# Altium PCB isg_cena_host_board_rev1.PcbDoc
Units mil, origin at the board's own origin, x right, y up, seen from the top; angles counter-clockwise.
Board outline 3600 x 3600 mil, 2 copper layers (Top Layer, Bottom Layer); 44 components, 52 nets, 265 pads, 4 vias.
Unrouted connection lines stored in the file: 183.
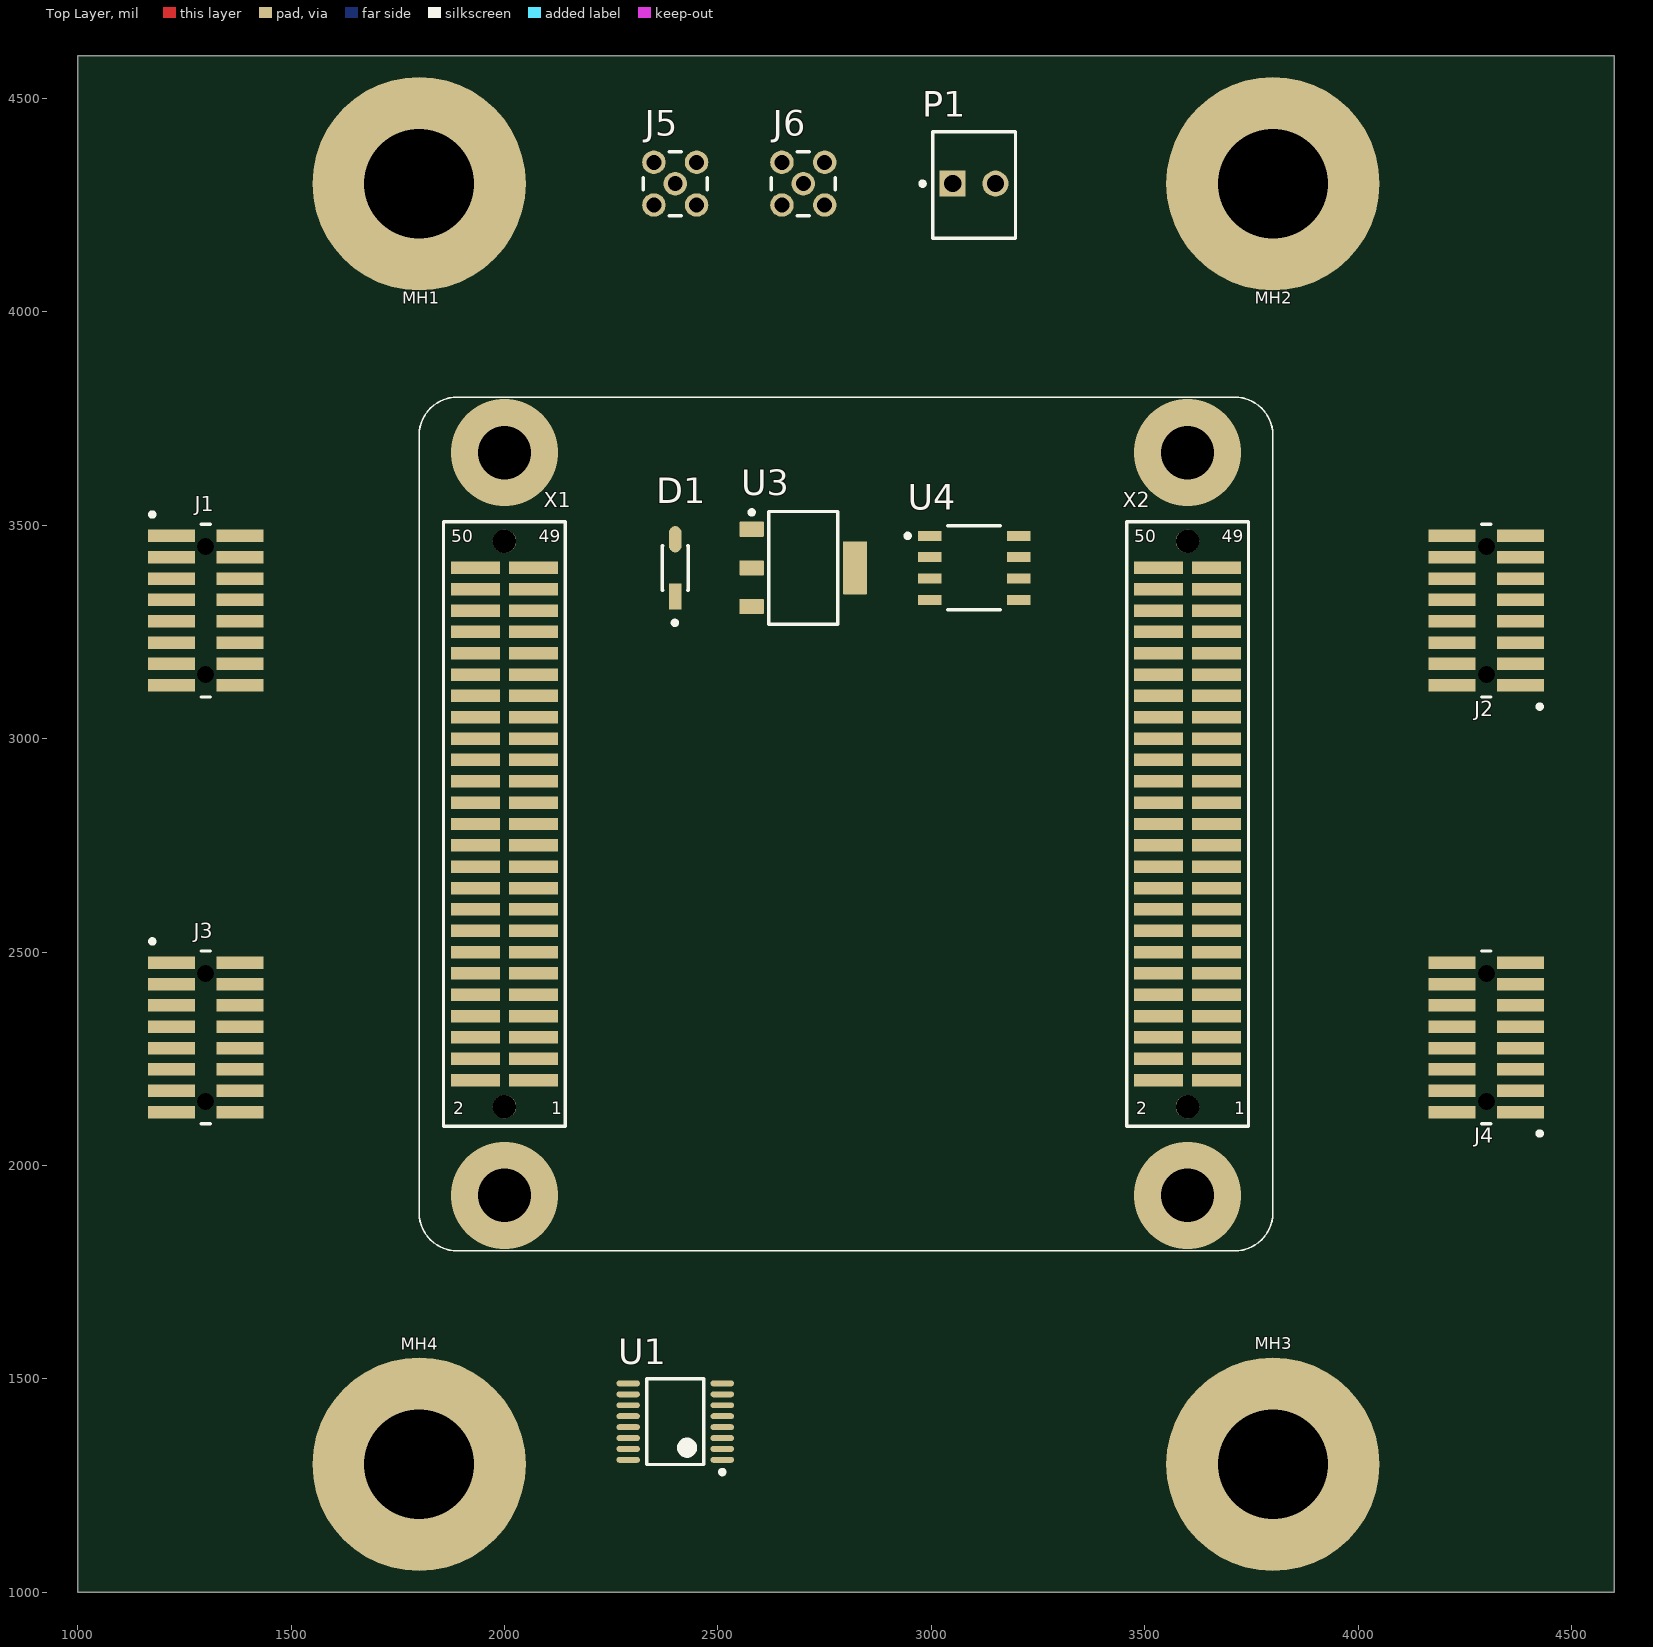
[diagram p0: Top Layer view]
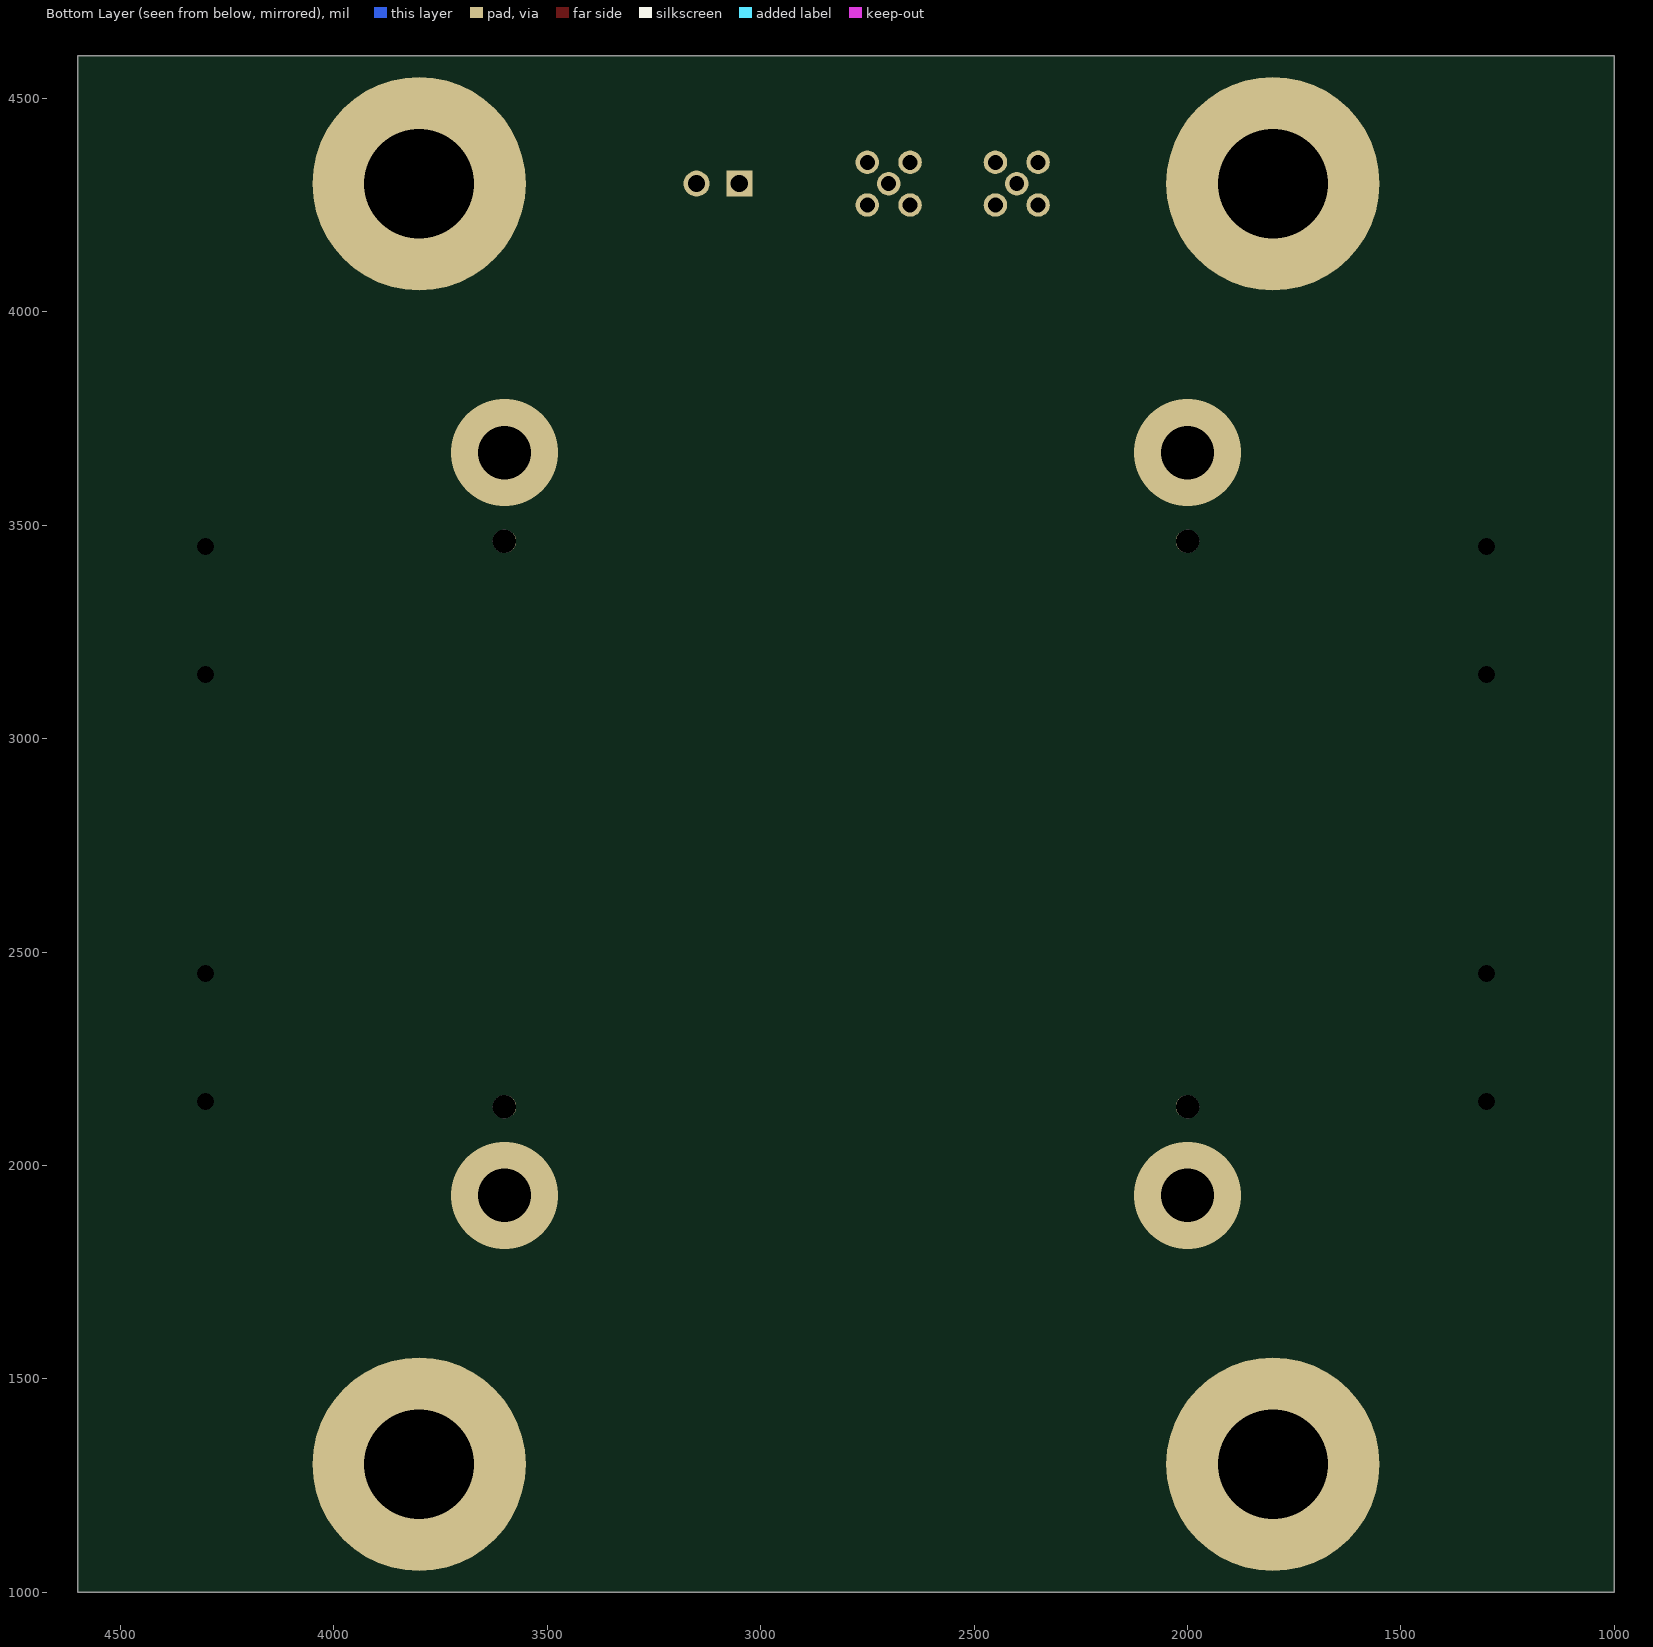
[diagram p1: Bottom Layer view, seen from below]

## Layer stack, top to bottom
Top Solder: solder mask 0.4, Solder Resist, Dk 3.5
Top Layer: signal copper 1.4
Dielectric 1: dielectric 12.6, FR-4, Dk 4.8
Bottom Layer: signal copper 1.4
Bottom Solder: solder mask 0.4, Solder Resist, Dk 3.5

## Board outline
1000,1000 4600,1000 4600,4600 1000,4600

## Design rules (kind name [scope] priority, off if disabled: settings)
Clearance [All] p1: gap=10 ignorepadtopadclearanceinfootprint=FALSE except(0: Arc-Hole Track-Hole SMDPad-Hole THPad-Hole Via-Hole Fill-Hole Poly-Hole Region-Hole Text-Hole)
PolygonConnect [All] p1: connectstyle=Relief reliefconductorwidth=10 reliefentries=4 polygonreliefangle="90 Angle" airgapwidth=10
RoutingVias [All] p1: holewidth=28 width=50 viastyle="Through Hole" minholewidth=28 minwidth=50 maxholewidth=28 maxwidth=50
SolderMaskExpansion [All] p1: expansion=4 istentingtop=FALSE
Width [All] p1: maxlimit=10 minlimit=10 preferedwidth=10
30 further rules are at their usual default settings.

## Components (designator, comment, footprint, x,y, rotation, side; value= is the part's Value field where it differs from the comment)
C1 "CAP CER 0.1uF 50V X7R 0603" FP-CC0603-DA-MFG 7600,2900 r0 top value="100 nF"
C2 "CAP CER 1uF 0805 16V X7R" CAPC2013X140X50NL20T25 7800,2900 r0 top
C3 "CAP CER 10uF 0805 10V X7R" CAPC2013X140X50NL20T25 8000,2900 r0 top
C4 "CAP CER 0.1uF 50V X7R 0603" FP-CC0603-DA-MFG 6600,2900 r0 top value="100 nF"
C5 "CAP CER 0.1uF 50V X7R 0603" FP-CC0603-DA-MFG 6800,2900 r0 top value="100 nF"
C6 "CAP CER 1uF 0805 16V X7R" CAPC2013X140X50NL20T25 11600,2700 r0 top
C7 "CAP CER 10uF 0805 10V X7R" CAPC2013X140X50NL20T25 11800,2900 r0 top
C8 "CAP CER 0.1uF 50V X7R 0603" FP-CC0603-DA-MFG 11100,2900 r0 top value="100 nF"
C9 "CAP CER 0.1uF 50V X7R 0603" FP-CC0603-DA-MFG 5500,2900 r0 top value="100 nF"
D1 "1N5819HW-7-F" FP-SOD123-IPC_A 2400,3400 r90 top
J1 "" FP-FTSH-108-02-F-DV 1300,3300 r270 top
J2 "" FP-FTSH-108-02-F-DV 4300,3300 r90 top
J3 "" FP-FTSH-108-02-F-DV 1300,2300 r270 top
J4 "" FP-FTSH-108-02-F-DV 4300,2300 r90 top
J5 "CONMMCX002" CON-MMCX-RA 2400,4300 r0 top
J6 "CONMMCX002" CON-MMCX-RA 2700,4300 r0 top
MH1 "OPTICAL-MOUNT-HOLE-1/4-20" MH-1/4-20 1800,4300 r0 top
MH2 "OPTICAL-MOUNT-HOLE-1/4-20" MH-1/4-20 3800,4300 r0 top
MH3 "OPTICAL-MOUNT-HOLE-1/4-20" MH-1/4-20 3800,1300 r0 top
MH4 "OPTICAL-MOUNT-HOLE-1/4-20" MH-1/4-20 1800,1300 r0 top
P1 "22-23-2021" MOLX-22-23-2021_V 3100,4300 r0 top
R1 "RES SMD 0 OHM 0603" RESC1609X50X30LL10T20 7500,2900 r0 top
R2 "DNP" RESC1609X50X30LL10T20 6200,2900 r0 top
R3 "RES SMD 0 OHM 0603" RESC1609X50X30LL10T20 11500,2900 r0 top
R4 "RES SMD 240 OHM 0603" RESC1609X50X30LL10T20 11300,2900 r0 top
R5 "RES SMD 100 OHM 0603" RESC1609X50X30LL10T20 10700,2900 r0 top
TP1 "5001" KSTN-5001 7000,1600 r0 top
TP2 "5001" KSTN-5001 7200,1600 r0 top
TP3 "5001" KSTN-5001 9900,2800 r0 top
TP4 "5001" KSTN-5001 10100,2800 r0 top
TP5 "5002" KSTN-5002 5200,1000 r0 top
TP6 "5002" KSTN-5002 5200,1300 r0 top
TP7 "5002" KSTN-5002 5200,1600 r0 top
TP8 "5002" KSTN-5002 5200,1900 r0 top
TP9 "5002" KSTN-5002 5300,2800 r0 top
TP10 "5002" KSTN-5002 12400,2800 r90 top
TP11 "5002" KSTN-5002 12600,2800 r90 top
TP12 "5001" KSTN-5001 10800,2800 r90 top
U1 "DAC8555IPWG4" TI-PW16_L 2400,1400 r180 top
U2 "MCP1541T-I/TT" SOT-23-TT3_L 6400,2800 r0 top
U3 "LM317EMP/NOPB" DCY0004A_L 2700,3400 r0 top
U4 "LM317LD13TR" FP-SO-8-0016023-MFG 3100,3400 r0 top
X1 "TFM-125-02-X-D-A" SAMTEC-TFM-125-02-X-D-A 2000,2800 r90 top
X2 "TFM-125-02-X-D-A" SAMTEC-TFM-125-02-X-D-A 3600,2800 r90 top

## Footprints (in the part's own frame and the unit in brackets; to place one, negate y for a bottom-side part, rotate by r counter-clockwise, add the part's x,y. Pads: shape width x height; smd on the part's side, far side on the other; paste and mask are expansions set on the pad)
CAPC2013X140X50NL20T25 [mm] "Chip Capacitor, 2-Leads, Body 2.00x1.25mm, IPC Medium Density"
  rect 1.3x1.45 smd: 1(-0.8,0) 2(0.8,0)
  body extent -1.1,-0.72 1.1,0.72, height 1.4
CON-MMCX-RA [mil] "Connector, MMCX Female, 5-Lead, Thru-Hole, Right-Angle, Body 3.45x3.45mm"
  round 55 hole 35: 1(0,0) 2(-50,50) 3(50,50) 4(50,-50) 5(-50,-50)
  silkscreen extent -75,-75 75,75
DCY0004A_L [mm] "SOT223, 4-Leads, Body 6.7x3.7mm, Pitch 2.3mm, IPC High Density"
  rrect11% 1.45x0.9 smd: 1(-3.075,2.3) 2(-3.075,0) 3(-3.075,-2.3)
  rrect7% 1.45x3.15 smd: 4(3.075,0)
  silkscreen extent -3.2,-3.35 2.05,3.42, body extent -3.5,-3.25 3.5,3.25, height 1.62
FP-CC0603-DA-MFG [mm]
  rect 0.8x0.9 smd paste+0 mask+0: 1(-0.75,0) 2(0.75,0)
  silkscreen extent -0.85,-0.85 0.85,0.85, body extent -1.35,-0.75 1.35,0.75, height 0.25
FP-FTSH-108-02-F-DV [mm]
  rect 0.74x2.79 smd paste+0 mask+0: 1(-4.445,-2.035) 2(-4.445,2.035) 3(-3.175,-2.035) 4(-3.175,2.035) 5(-1.905,-2.035) 6(-1.905,2.035) 7(-0.635,-2.035) 8(-0.635,2.035) 9(0.635,-2.035) 10(0.635,2.035) 11(1.905,-2.035) 12(1.905,2.035) 13(3.175,-2.035) 14(3.175,2.035) 15(4.445,-2.035) 16(4.445,2.035)
  round 0.1 hole 1.02 unplated: H1(-3.81,0) H2(3.81,0)
  silkscreen extent -5.84,-3.3 5.15,0.27, body extent -5.25,-3.53 5.25,3.53, height 0.25
FP-SO-8-0016023-MFG [mm]
  rect 1.4x0.6 smd paste+0 mask+0: 1(-2.65,1.905) 2(-2.65,0.635) 3(-2.65,-0.635) 4(-2.65,-1.905) 5(2.65,-1.905) 6(2.65,-0.635) 7(2.65,0.635) 8(2.65,1.905)
  silkscreen extent -4.08,-2.5 1.58,2.5, body extent -3.45,-2.6 3.45,2.6, height 0.25
FP-SOD123-IPC_A [mil]
  rect 61.32x29.23 smd paste+0 mask+0: 1(-66.94,0)
  rrect100% 61.32x29.23 smd paste+0 mask+0: 2(66.94,0)
  silkscreen extent -134,-31 52,31, body extent -117,-50 117,50, height 10
KSTN-5001 [mm] "Test Point, Through Hole, Dia 2.54mm"
  round 1.55 hole 1.016: 1(0,0)
  silkscreen extent -1.27,-1.27 1.27,1.27, body extent -1.25,-1.25 1.25,1.25, height 4.62
KSTN-5002 [mm] "Test Point, Through Hole, Dia 2.54mm"
  round 1.55 hole 1.016: 1(0,0)
  silkscreen extent -1.27,-1.27 1.27,1.27, body extent -1.25,-1.25 1.25,1.25, height 4.62
MH-1/4-20 [mil]
  round 500 hole 257: PAD(0,0)
MOLX-22-23-2021_V [mm] "THD, 2-Leads, Body 6.35x4.93mm, Pitch 2.54mm"
  rect 1.55x1.55 hole 1.02: 1(-1.27,0)
  round 1.55 hole 1.02: 2(1.27,0)
  silkscreen extent -3.19,-3.25 2.46,3.1, body extent -2.46,-3.25 2.46,3.1, height 10.66
RESC1609X50X30LL10T20 [mm] "Chip Resistor, 2-Leads, Body 1.55x0.85mm, IPC High Density"
  rect 0.7x0.85 smd: 1(-0.575,0) 2(0.575,0)
  body extent -0.82,-0.48 0.82,0.48, height 0.5
SAMTEC-TFM-125-02-X-D-A [mm]
  rect 0.74x2.92 smd: 1(-15.24,-1.714) 2(-15.24,1.714) 3(-13.97,-1.714) 4(-13.97,1.714) 5(-12.7,-1.714) 6(-12.7,1.714) 7(-11.43,-1.714) 8(-11.43,1.714) 9(-10.16,-1.714) 10(-10.16,1.714) 11(-8.89,-1.714) 12(-8.89,1.714) 13(-7.62,-1.714) 14(-7.62,1.714) 15(-6.35,-1.714) 16(-6.35,1.714) 17(-5.08,-1.714) 18(-5.08,1.714) 19(-3.81,-1.714) 20(-3.81,1.714) 21(-2.54,-1.714) 22(-2.54,1.714) 23(-1.27,-1.714) 24(-1.27,1.714) 25(0,-1.714) 26(0,1.714) 27(1.27,-1.714) 28(1.27,1.714) 29(2.54,-1.714) 30(2.54,1.714) 31(3.81,-1.714) 32(3.81,1.714) 33(5.08,-1.714) 34(5.08,1.714) 35(6.35,-1.714) 36(6.35,1.714) 37(7.62,-1.714) 38(7.62,1.714) 39(8.89,-1.714) 40(8.89,1.714) 41(10.16,-1.714) 42(10.16,1.714) 43(11.43,-1.714) 44(11.43,1.714) 45(12.7,-1.714) 46(12.7,1.714) 47(13.97,-1.714) 48(13.97,1.714) 49(15.24,-1.714) 50(15.24,1.714)
  round 1.4 hole 1.4: MH1(-16.828,0) MH2(16.828,0)
  silkscreen extent -17.98,-3.63 17.98,3.63
SOT-23-TT3_L [mm] "SOT23, 3-Leads, Body 2.9x1.3mm, Pitch 0.95mm, Lead Span 2.4mm, IPC High Density"
  rect 1.2x0.6 smd: 1(-0.9,0.95) 2(-0.9,-0.95) 3(0.9,0)
  silkscreen extent -1.02,-1.55 0.7,1.92, body extent -0.7,-1.52 0.7,1.53, height 1.12
TI-PW16_L [mm] "SOP, 16-Leads, Body 5x4.4mm, Pitch 0.65mm, IPC High Density"
  oval 1.4x0.35 smd: 1(-2.8,2.275) 2(-2.8,1.625) 3(-2.8,0.975) 4(-2.8,0.325) 5(-2.8,-0.325) 6(-2.8,-0.975) 7(-2.8,-1.625) 8(-2.8,-2.275) 9(2.8,-2.275) 10(2.8,-1.625) 11(2.8,-0.975) 12(2.8,-0.325) 13(2.8,0.325) 14(2.8,0.975) 15(2.8,1.625) 16(2.8,2.275)
  silkscreen extent -2.93,-2.55 1.7,3.12, body extent -2.25,-2.55 2.25,2.55, height 1.2

## Part data
C1 C4 C5 C8 C9: library part CMP-03422-000030-1, Capacitance="100 nF", Manufacturer=YAGEO, Manufacturer Part Number=CC0603KRX7R7BB104, Package=CC0603-DA, Temperature="-55°C to +125°C", Temperature Characteristic=X7R, Temperature Coefficient=15%, Temperature Range High=+125°C, Temperature Range Low=-55°C, Tolerance=0.1, Voltage="16 V", Automotive=No, Category=Cap, ComponentLink2Description=Datasheet, ComponentLink2URL=http://www.yageo.com/documents/recent/UPY-GPHC_X7R_6.3V-to-50V_18.pdf, Device Class L1="Passive Components", Device Class L2=Capacitors, Device Class L3="Ceramic Capacitors", Digikey Description="CAP CER 0.1UF 16V X7R 0603", Footprint Url=http://www.yageo.com/exep/pages/download/literatures/UPY-C_GEN_24.pdf, Height=0.9mm, Lead Free=Yes, Material=Ceramic, Mouser Description="Multilayer Ceramic Capacitor, CC Series, 0.1 - F, - 10%, X7R, 16 V, 0603 [1608 Metric]", Octopart=https://octopart.com/cc0603krx7r7bb104-yageo-192941, RoHS=TRUE, Voltage Rating="16 V"
C2 C3 C6 C7: library part CMP-2007-04677-1, Manufacturer="AVX Interconnect / Elco", Part Number=0805ZC475KAT2A
D1: library part CMP-0303-00003-3, "DIODE SCHOTTKY 40V 1A SOD123", Average Rectified Current=1A, Capacitance=110pF, Case/Package=SOD-123-2, Forward Voltage=450mV, Max Forward Surge Current (Ifsm)=25A, Max Operating Temperature=125°C, Max Power Dissipation=450mW, Max Repetitive Reverse Voltage (Vrrm)=40V, Min Operating Temperature=-65°C, Package Quantity=3000, Peak Reverse Current=50uA, Contact Plating=Tin, Current Rating=1A, Element Configuration=Single, Forward Current=1A, Height=1.25mm, Lead Free="Lead Free", Length=2.85mm, Max Reverse Voltage (DC)=40V, Number of Pins=2, Output Current=1A, Packaging="Tape and Reel", Peak Non-Repetitive Surge Current=25A, Polarity=Standard, Radiation Hardening=No, REACH SVHC="No SVHC", Termination=SMD/SMT, Voltage Rating (DC)=40V, Weight=0.000353oz, Width=1.7mm
J1 J2 J3 J4: library part FP-FTSH-108-02-F-DV, "CONN HEADER SMD 16POS 1.27MM", Current Rating=3.4A, Manufacturer=Samtec, Manufacturer Part Number=FTSH-108-02-F-DV, Temperature="-55°C to +125°C", Temperature Range High=+125°C, Temperature Range Low=-55°C, Automotive=No, Category=Conn, ComponentLink2Description=Datasheet, ComponentLink2URL=http://suddendocs.samtec.com/prints/ftsh-1xx-xx-xxx-dv-xxx-xxx-mkt.pdf, Conn Gender=Male, Conn Orientation=Vertical, Contact Material=Gold,Nickel, Device Class L1=Connectors, Device Class L2="Headers and Wire Housings", Device Class L3=unset, Digikey Description="CONN HEADER SMD 16POS 1.27MM", Footprint Url=http://suddendocs.samtec.com/prints/ftsh-1xx-xx-xxx-dv-xxx-footprint.pdf, Height=5.09mm, Lead Free=Yes, Mouser Description="Conn Unshrouded Header HDR 16 POS 1.27mm Solder ST SMD Tube", Number Of Contacts=16, Number Of Rows=2, Octopart=https://octopart.com/ftsh-108-02-f-dv-samtec-10605893, Package=FTSH-108-02-F-DV, Pitch=1.27mm, RoHS=TRUE, Standoff Height=0.46mm
J5 J6: library part CMP-0168-00017-1, "MMCX Female Right Angle PCB Mount Connector, Thru-Hole", DatasheetVersion="rev1.0, Jun-2007", PackageDescription="MMCX Female Right Angle PCB Mount Connector, Thru-Hole, 3.45 x 3.45 mm Body", PackageReference=CON-MMCX-RA, PackageVersion="rev1.0, Jun-2007", PCB_Layout="Pads complies with manufacturer's recommendation."
P1: library part CMP-1704-00001-3, "Male Header, Pitch 2.54 mm, 1 x 2 Position, Height 10.67 mm, Tail Length 3.56 mm, 0 to 75 degC, RoHS, Bulk", Max Operating Temperature="75 degC", Min Operating Temperature="0 degC", Package Quantity=3000, ComponentLink1Description="Manufacturer URL", ComponentLink1URL=http://www.molex.com/, ComponentLink2Description=Datasheet, ComponentLink2URL=https://datasheet.ciiva.com/19454/232266-19454304.pdf, Height="10.67 mm", Length="5.08 mm", Mount="Through Hole", Mounting Technology="Through Hole", PackageDescription="Male Header, Pitch 2.54 mm, 1 x 2 Position, Height 10.67 mm, Tail Length 3.56 mm", Packaging=Bulk, PartNumber=22-23-2021, Pins=2, Radiation Hardening=No, REACH SVHC=Unknown, RoHSCompliant=True, Width="6.35 mm"
R1 R2 R3 R4 R5: library part CMP-2000-03820-1, Manufacturer="Vishay Dale", Part Number=CRCW0603100KFKEA
TP1 TP2 TP3 TP4 TP12: library part CMP-2000-05181-1, "Test Point, Black, 1-Pin THD, RoHS, Bulk", Alternate Color="5004K-ND / -TESTPOINTPCMINI.040\"DYELLOW / 5003K-ND / -TESTPOINTPCMINI.040\"DORANGE / 5002K-ND / -TESTPOINTPCMINI.040\"DWHITE / 5000K-ND / -TESTPOINTPCMINI.040\"DRED", Color=Black, Manufacturer=Keystone, Standard Package=100, Catalog Drawings=5000Series, Category=TestandMeasurement, Datasheet URL=https://ciiva.com/datasheet-click-2917627?src=ciiva&sig=bd195616, Datasheet Version="Rev. G, 12/2008", Family=TestPoints, Kits="DKTGRS232C-KIT-ND / -TTLCONVERTER", Manufacturer URL=http://www.keyelco.com/, Material=Base,Nylon46,UL94V-0, Mounting Type="0.040\"(1.02mm)HoleDiameter", Online Catalog=ColorCodedTestPoints, Other Names=5001K, Packaging=Bulk, RoHS Information=RoHSComplianceStatement, Series=THM, Terminal="0.010\"x0.020\"(0.25mmx0.51mm)PhosphorBronzeWire,SilverPlated", Type=PCTestPoint,Miniature
TP5 TP6 TP7 TP8 TP9 TP10 TP11: library part CMP-2000-05182-1, "Test Point, White, 1-Pin THD, RoHS, Bulk", Color=White, Manufacturer=KeystoneElectronics, Brand=KeystoneElectronics, Contact Material=PhosphorBronze, Datasheet URL=https://ciiva.com/datasheet-click-2917627?src=ciiva&sig=bd195616, Datasheet Version="Rev. G, 12/2008", Length=7.62mm, Manufacturer URL=http://www.keyelco.com/, Material=Nylon, Mounting Hole Size=1mm, Outside Diameter=2.54mm, Packaging=Bulk, Plating=Silver, Product=TestPoints, Product Category=CircuitBoardHardware-PCB, RoHS=True, Type=Miniature
U1: library part CMP-0004-01174-1, "16-Bit, Quad Channel, Ultralow Glitch, Voltage Output Digital to Analog Converter, -40 to 105 degC, 16-pin SOP (PW16), Green (RoHS & no Sb/Br)", Manufacturer="Texas Instruments", Code_JEDEC=MO-153, ComponentLink1Description="Manufacturer URL", ComponentLink1URL=http://www.ti.com/, ComponentLink2Description=Datasheet, ComponentLink2URL=http://www.ti.com/general/docs/lit/getliterature.tsp?genericPartNumber=DAC8555&fileType=pdf, ComponentLink3Description="Package Specification", ComponentLink3URL=http://www.ti.com/lit/ml/mpds361/mpds361.pdf, DAC Channels=4, DatasheetVersion=SLAS475B, DNL(Max)(+/-LSB)=1, Eco-Plan="Green (RoHS & no Sb/Br)", Interface="Serial SPI", Mounting Technology="Surface Mount", PackageDescription="16-Pin Plastic Small Outline, Body 5 x 4.4 mm, Pitch 0.65 mm", PackageReference=PW16, PackageVersion="4040064-4/G, 02/2011", PartNumber=DAC8555IPWG4, Resolution(Bits)=16, Settling Time(us)=10, SFDR(dB)=87, SNR(dB)=95, SubFamily="Precision DAC (=<10MSPS)"
U2: library part CMP-0131-00004-1, "4.096V Voltage Reference, 3-Pin SOT-23, Industrial Temperature, Tape and Reel", Code_IPC=SOT23-3, DatasheetVersion="revB, Feb-2005", PackageDescription="3-Lead Plastic Small Outline Transistor (TT) [SOT-23]", PackageReference=SOT-23-TT3, PackageVersion="revBB, Aug-2009"
U3: library part CMP-0062-01707-3, "3-Terminal Adjustable Regulator, 4-pin SOT-223, Pb-Free", Manufacturer="Texas Instruments", PackageTopMarking=XYTT*N01A, PowerWise=N, Code_IPC=SOT223-4, Code_JEDEC=TO-261-AA, ComponentLink1Description="Datasheet URL", ComponentLink1URL=http://www.ti.com/general/docs/lit/getliterature.tsp?genericPartNumber=LM317-N&fileType=pdf, CompType="LDO IC", PackageDescription="Molded SOT-223, 6.50 x 3.56 x 1.6mm Body, 4 Lead, 2.3mm Pitch", PackageReference=DCY0004A, PinCount=4, RoHS=Y
U4: library part CMP-0244-00272-2, "IC REG LINEAR POS ADJ 100MA 8SO", Case/Package=SO, Max Input Voltage=40V, Max Operating Temperature=125°C, Max Output Current=200mA, Max Output Voltage=37V, Min Input Voltage=4.2V, Min Operating Temperature=0°C, Min Output Voltage=1.2V, Output Current=100mA, Package Quantity=1, Power Supply Rejection Ratio (PSRR)=80dB, Reference Voltage=1.3V, Tolerance=5%, Contact Plating=Tin, Height=1.25mm, Lead Free="Lead Free", Length=5mm, Mount="Surface Mount", Number of Outputs=1, Number of Pins=8, Number of Regulators=1, Output Type=Adjustable, Output Voltage=37V, Packaging="Tape and Reel", Polarity=Positive, Radiation Hardening=No, REACH SVHC="No SVHC", Weight=0.01787oz, Width=4mm
X1 X2: "SAMTEC TFM-125-02-X-D-A"

## Via types
v1: diameter 250, hole 125, Top Layer to Bottom Layer, 4 vias

## Nets (pads, with @x,y where several pads share a name; then routed paths per layer and width w, separated by ;. In a path a pad name is that pad's centre, name@x,y a point inside that pad or via, vN(x,y) a via of type N, cw(c..) or ccw(c..) an arc to the next point about the centre after c; other vN are vias at no path point)
AVDD: C4.1 C9.1 R1.2 U1.4 U2.1
AVDD_CHIP: X2.5 X2.6
CTIAAddr<0>: J2.4 X2.38
CTIAAddr<1>: J2.8 X2.42
CTIAAddr<2>: J2.12 X2.46
CTIAAddr<3>: J2.16 X2.50
CTIAOutN: X2.32
CTIAOutP: X2.34
DAC_DIN: J3.6 U1.11
DAC_E\N\A\B\L\E\: J3.12 U1.15
DAC_LDAC: J3.14 U1.16
DAC_R\S\T\: J3.8 U1.13
DAC_REFP: C1.1 C2.1 C3.1 R1.1 R2.1 TP9.1 U1.3
DAC_RSTSEL: J3.10 U1.14
DAC_S\Y\N\C\: J3.2 U1.9
DAC_SCLK: J3.4 U1.10
DAC_VOUTA: TP5.1 U1.1
DAC_VOUTB: TP6.1 U1.2
DAC_VOUTC: TP7.1 U1.7
DAC_VOUTD: TP8.1 U1.8
DVDD: C5.1 C6.1 C7.1 D1.2 R4.2 TP11.1 U1.12 U3.2
DVDD_FB: R4.1 R5.2 U3.1
DVDD_IN: C8.1 D1.1 R3.2 TP10.1 U3.3
GND: C1.2 C2.2 C3.2 C4.2 C5.2 C6.2 C7.2 C8.2 C9.2 J1.1 J1.3 J1.5 J1.7 J1.9 J1.11 J1.13 J1.15 J2.1 J2.3 J2.5 J2.7 J2.9 J2.11 J2.13 J2.15 J3.1 J3.3 J3.5 J3.7 J3.9 J3.11 J3.13 J3.15 J4.1 J4.3 J4.5 J4.7 J4.9 J4.11 J4.13 J4.15 J5.2 J5.3 J5.4 J5.5 J6.2 J6.3 J6.4 J6.5 P1.1 R5.1 TP1.1 TP2.1 TP3.1 TP4.1 TP12.1 U1.5 U1.6 U2.3 X1.1 X1.2 X1.7 X1.8 X1.13 X1.14 X1.16 X1.17 X1.18 X1.20 X1.21 X1.22 X1.24 X1.25 X1.26 X1.28 X1.29 X1.30 X1.32 X1.33 X1.34 X1.36 X1.37 X1.38 X1.40 X1.42 X1.43 X1.44 X1.46 X1.47 X1.48 X1.50 X2.3 X2.4 X2.7 X2.8 X2.9 X2.11 X2.13 X2.15 X2.17 X2.19 X2.21 X2.22 X2.23 X2.25 X2.27 X2.29 X2.30 X2.31 X2.33 X2.35 X2.36 X2.37 X2.39 X2.41 X2.43 X2.45 X2.47 X2.49
HSClk_N: J5.1 X1.41
HSClk_P: J6.1 X1.39
HVDD_CHIP: X1.9 X1.10 X1.11 X1.12
IRefCML2CMOS: X1.45
IRefCTIA: X2.24
IRefLocalBuf: X2.26
IRefPadBuf: X2.28
LED_DAC: J3.16
NetR2_2: R2.2 U2.2
Phi_R_Fast: J4.8 X2.12
Phi_R_Slow: J4.14 X2.18
Phi_RST_Fast: J4.10 X2.14
Phi_RST_Slow: J4.16 X2.20
Phi_S_Fast: J4.6 X2.10
Phi_S_Slow: J4.12 X2.16
SClkN: J1.2 X1.19
SClkP: J1.4 X1.31
Senable: J1.12 X1.23
SIn: J1.6 X1.15
SiteAddr<0>: J2.6 X2.40
SiteAddr<1>: J2.10 X2.44
SiteAddr<2>: J2.14 X2.48
SOut: J1.14 X1.49
SReset: J1.8 X1.27
SUpdate: J1.10 X1.35
VDD_CHIP: X1.3 X1.4 X1.5 X1.6
VPD_ANODE: X2.1 X2.2
VSUPPLY_P5V0: P1.2
pads on no net: J1.16 J1.H1 J1.H2 J2.2 J2.H1 J2.H2 J3.H1 J3.H2 J4.2 J4.4 J4.H1 J4.H2 MH1.PAD MH2.PAD MH3.PAD MH4.PAD R3.1 U3.4 U4.1 U4.2 U4.3 U4.4 U4.5 U4.6 U4.7 U4.8 X1.MH1 X1.MH2 X2.MH1 X2.MH2
copper on no net:
  other v1: 2000,1930 3600,1930 2000,3670 3600,3670

## Silkscreen, mask and mechanical layers (free items; w line width, h text height)
Top Overlay:
  lines w4: 1800,1890.15 ccw(c1890.15,1890.15) 1890.15,1800 3709.85,1800 ccw(c3709.85,1890.15) 3800,1890.15 3800,3709.85 ccw(c3709.85,3709.85) 3709.85,3800 1890.15,3800 ccw(c1890.15,3709.85) 1800,3709.85 1800,1890.15

## Text inside footprints (layer, text, board x,y; h text height)
X1: Top Overlay "50" at 1875,3450 h50; Top Overlay "49" at 2080,3450 h50; Top Overlay "1" at 2110,2110 h50; Top Overlay "2" at 1879.96,2110 h50; Mechanical 40 "3.429" at 2005,1911.5 h15.5 r90; Mechanical 40 "5.715" at 2005,1841.5 h15.5 r90; Mechanical 40 "1.714" at 2162.52,2004.02 h15.5 r90; Mechanical 40 "1.587" at 2220,2049.02 h15.5 r90; Mechanical 40 "1.270" at 1820,2096.5 h15.5 r90; Mechanical 40 "34.925" at 2277.48,2768.5 h15.5 r90; Mechanical 40 "33.655" at 2177.48,2768.5 h15.5 r90; Mechanical 40 "30.480" at 1780,2768.5 h15.5 r90; Mechanical 16 "1" at 2092.52,2038.23 h77.5 r90; Mechanical 16 "2" at 1957.48,2038.23 h77.5 r90; Mechanical 16 "49" at 2092.52,3521.22 h77.5 r90
X2: Top Overlay "1" at 3710,2110 h50; Top Overlay "2" at 3480,2110 h50; Top Overlay "49" at 3680,3450 h50; Top Overlay "50" at 3475,3450 h50; Mechanical 40 "3.429" at 3605,1911.5 h15.5 r90; Mechanical 40 "5.715" at 3605,1841.5 h15.5 r90; Mechanical 40 "1.714" at 3762.52,2004.02 h15.5 r90; Mechanical 40 "1.587" at 3820,2049.02 h15.5 r90; Mechanical 40 "1.270" at 3420,2096.5 h15.5 r90; Mechanical 40 "34.925" at 3877.48,2768.5 h15.5 r90; Mechanical 40 "33.655" at 3777.48,2768.5 h15.5 r90; Mechanical 40 "30.480" at 3380,2768.5 h15.5 r90; Mechanical 16 "1" at 3692.52,2038.23 h77.5 r90; Mechanical 16 "2" at 3557.48,2038.23 h77.5 r90; Mechanical 16 "49" at 3692.52,3521.22 h77.5 r90; Mechanical 16 "50" at 3557.48,3521.22 h77.5 r90